# Altium PCB yksb.PcbDoc
Units mm, origin at the board's own origin, x right, y up, seen from the top; angles counter-clockwise.
Board outline 127.76 x 55 mm, 2 copper layers (Top Layer, Bottom Layer); 31 components, 45 nets, 156 pads, 31 vias.
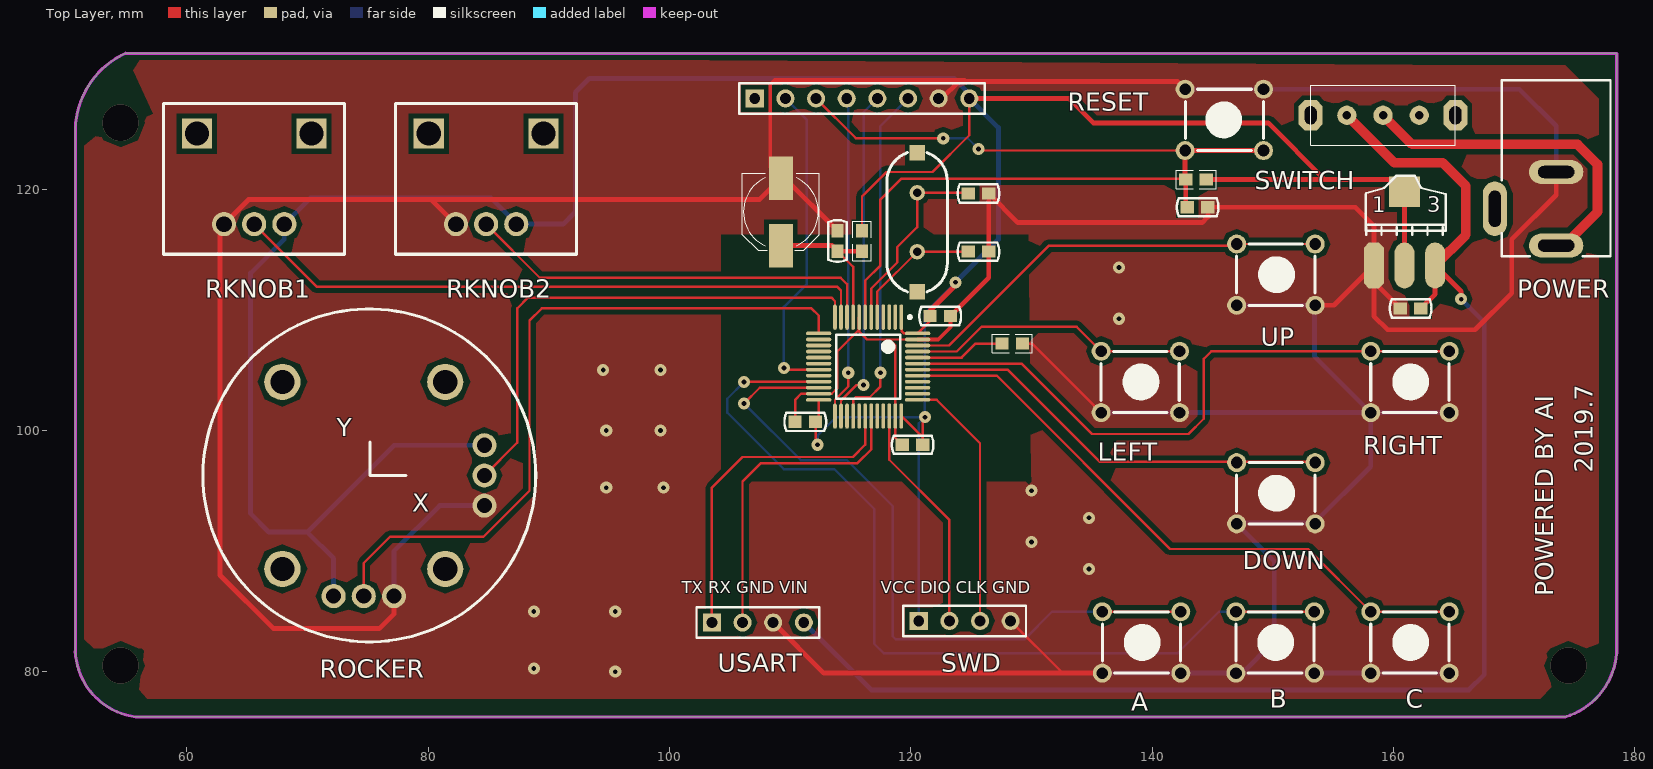
[diagram p0: Top Layer view]
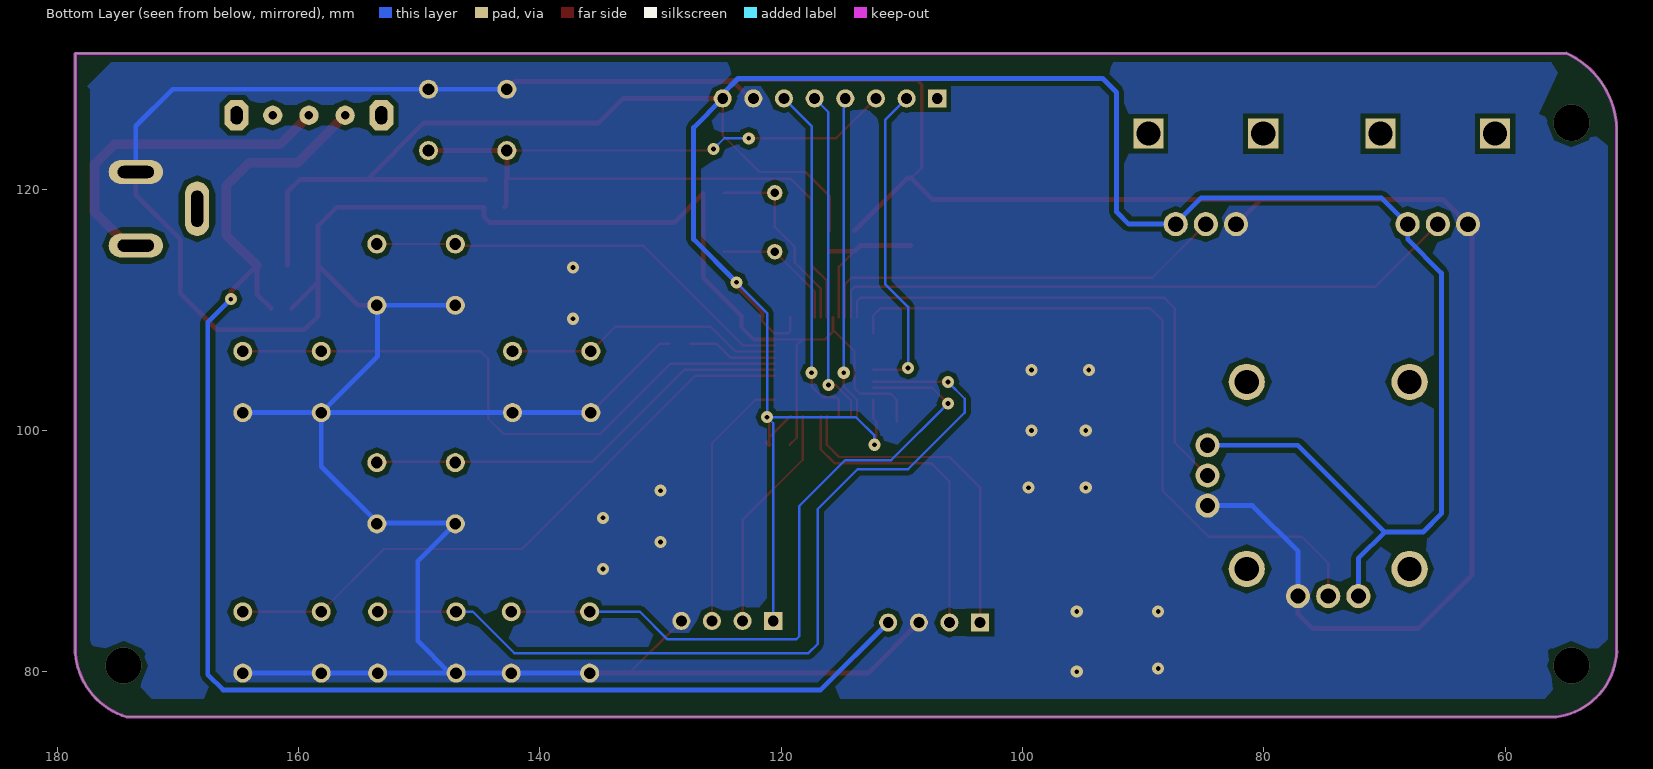
[diagram p1: Bottom Layer view, seen from below]

## Layer stack, top to bottom
Top Solder: solder mask 0.0102, Solder Resist, Dk 3.5
Top Layer: signal copper 0.0356
Dielectric 1: dielectric 0.32, FR-4, Dk 4.8
Bottom Layer: signal copper 0.0356
Bottom Solder: solder mask 0.0102, Solder Resist, Dk 3.5

## Board outline
55.75,76.25 cw(c56.494,81.957) 50.744,81.707 50.75,81.713 50.75,125 cw(c57.905,124.753) 54.905,131.253 54.908,131.25 178.5,131.25 178.5,81.511 178.49,81.501 cw(c172.5,82) 174.25,76.25

## Design rules (kind name [scope] priority, off if disabled: settings)
Clearance [All] p1: gap=0.4
PlaneClearance [All] p1: clearance=1
PolygonConnect [All] p1: connectstyle=Direct reliefconductorwidth=0.254 reliefentries=4 polygonreliefangle="90 Angle" airgapwidth=0.254
RoutingVias [All] p1: holewidth=0.6 width=1 viastyle="Through Hole" minholewidth=0.711 minwidth=1.27 maxholewidth=0.711 maxwidth=1.27
SolderMaskExpansion [All] p1: expansion=0.102
Width [All] p1: maxlimit=0.8 minlimit=0.2 preferedwidth=0.2
29 further rules are at their usual default settings.

## Classes and differential pairs
component class yksb: ""

## Components (designator, comment, footprint, x,y, rotation, side; value= is the part's Value field where it differs from the comment)
C2 "Cap" C-RAD-0603 161.417,110.109 r180 top
C3 "Cap" C-RAD-0603 122.428,109.474 r0 top
C4 "Cap" C-RAD-0603 120.142,98.806 r180 top
C5 "Cap" C-RAD-0603 111.252,100.711 r180 top
C8 "Cap" C-RAD-0603 143.764,118.491 r180 top
C9 "Cap" C-RAD-0603 113.919,115.697 r270 top
C10 "Cap Pol" C-RB-S6 109.22,118.11 r90 top
C11 "Cap" C-RAD-0603 125.603,114.808 r0 top
C12 "Cap" C-RAD-0603 125.603,119.634 r0 top
IC1 "STM32F103C8T6" LQFP48_M 116.459,105.283 r270 top
J1 "CON2" DC-005 173.482,114.427 r90 top
P1 "UART1" HDR1X4 103.505,84.074 r0 top
P2 "SWD" HDR1X4 120.65,84.201 r0 top
Q1 "" dianweiqi 65.572,117.094 r0 top
Q2 "" dianweiqi 84.796,117.094 r0 top
R1 "Res1" 0603-1 143.637,120.777 r180 top
R2 "Res1" 0603-1 115.951,115.697 r270 top
R3 "Res1" 0603-1 128.397,107.188 r0 top
S0 "SW-SPDT" SWITCH_A2 162.131,126.111 r180 top
S1 "KEY_4P" KEY_M 149.225,123.19 r180 top
S2 "KEY_4P" KEY_M 158.115,84.963 r0 top
S3 "KEY_4P" KEY_M 147,97.33 r0 top
S4 "KEY_4P" KEY_M 158.115,106.553 r0 top
S5 "KEY_4P" KEY_M 135.763,106.553 r0 top
S6 "KEY_4P" KEY_M 147,115.443 r0 top
S7 "KEY_4P" KEY_M 146.939,84.963 r0 top
S8 "KEY_4P" KEY_M 135.867,84.963 r0 top
TFT144 "Header 8" HDR1X8 107.061,127.508 r0 top
U1 "AMS1117-3.3" AMS1117 158.368,113.667 r0 top
Y1 "XTAL" XTAL_US 120.523,119.688 r270 top
yaogan1 "2dof" yaogan1 73.907,95.013 r0 top

## Footprints (in the part's own frame and the unit in brackets; to place one, negate y for a bottom-side part, rotate by r counter-clockwise, add the part's x,y. Pads: shape width x height; smd on the part's side, far side on the other; paste and mask are expansions set on the pad)
0603-1 [mm] "贴片带丝印"
  rect 1.1x1 smd: 1(-0.85,0) 2(0.85,0)
  silkscreen extent -1.65,-0.76 1.65,0.76, body extent -1.14,-0.38 1.14,0.38, height 1
AMS1117 [mil]
  oct 65x150 smd: 1(0.03,-0.06)
  oval 65x150 smd: 2(100.03,-0.06) 3(200.03,-0.06)
  rect 100x100 smd: 4(100.03,239.94)
  silkscreen extent -26,100 234,293
C-RAD-0603 [mm] "贴片电容"
  rect 1.1x1 smd: 1(-0.85,0) 2(0.85,0)
  silkscreen extent -1.73,-0.76 1.73,0.76, body extent -1.14,-0.38 1.14,0.38, height 1
C-RB-S6 [mm] "贴片电解"
  rect 3.6x2 smd: 1(-2.794,0) 2(2.794,0)
  silkscreen extent -3.2,-3.2 3.2,3.2
DC-005 [mm] "DC母座5.5mm"
  oval 2x4.5 hole 1 slot 3 at 90 deg: 1(0.889,0) 2(6.985,0)
  oval 4.5x2 hole 1 slot 3 at 0 deg: 3(3.937,5.08)
  silkscreen extent 0,-4.5 14.6,4.5, body extent 0,-4.44 14.6,4.45, height 11
dianweiqi [mm]
  round 2 hole 1.3: 1(2.5,0) 2(0,0) 3(-2.5,0)
  rect 2.5x2.5 hole 2: ""(-4.75,7.5) ""(4.75,7.5)
  silkscreen extent -7.5,-2.5 7.5,10
HDR1X4 [mm] "Connector; Header; 4 Position"
  rect 1.5x1.5 hole 0.9: 1(0,0)
  round 1.5 hole 0.9: 2(2.54,0) 3(5.08,0) 4(7.62,0)
  silkscreen extent -1.27,-1.27 8.89,1.27
HDR1X8 [mm] "Connector; Header; 8 Position"
  rect 1.5x1.5 hole 0.9: 1(0,0)
  round 1.5 hole 0.9: 2(2.54,0) 3(5.08,0) 4(7.62,0) 5(10.16,0) 6(12.7,0) 7(15.24,0) 8(17.78,0)
  silkscreen extent -1.27,-1.27 19.05,1.27
KEY_M [mil]
  round 62 hole 38: 1(0,0) 1(255.91,0) 2(0,-200) 2(255.91,-200)
  silkscreen extent 0,-200 255,0
LQFP48_M [mm] "Thin QFP, 48-Leads, Body 7x7mm, Pitch 0.5mm, IPC Low Density"
  oval 2.1x0.3 smd: 1(-4.1,2.75) 2(-4.1,2.25) 3(-4.1,1.75) 4(-4.1,1.25) 5(-4.1,0.75) 6(-4.1,0.25) 7(-4.1,-0.25) 8(-4.1,-0.75) 9(-4.1,-1.25) 10(-4.1,-1.75) 11(-4.1,-2.25) 12(-4.1,-2.75) 25(4.1,-2.75) 26(4.1,-2.25) 27(4.1,-1.75) 28(4.1,-1.25) 29(4.1,-0.75) 30(4.1,-0.25) 31(4.1,0.25) 32(4.1,0.75) 33(4.1,1.25) 34(4.1,1.75) 35(4.1,2.25) 36(4.1,2.75)
  oval 0.3x2.1 smd: 13(-2.75,-4.1) 14(-2.25,-4.1) 15(-1.75,-4.1) 16(-1.25,-4.1) 17(-0.75,-4.1) 18(-0.25,-4.1) 19(0.25,-4.1) 20(0.75,-4.1) 21(1.25,-4.1) 22(1.75,-4.1) 23(2.25,-4.1) 24(2.75,-4.1) 37(2.75,4.1) 38(2.25,4.1) 39(1.75,4.1) 40(1.25,4.1) 41(0.75,4.1) 42(0.25,4.1) 43(-0.25,4.1) 44(-0.75,4.1) 45(-1.25,4.1) 46(-1.75,4.1) 47(-2.25,4.1) 48(-2.75,4.1)
  silkscreen extent -4.22,-2.65 2.65,3.57, body extent -3.5,-3.5 3.5,3.5, height 1.6
SWITCH_A2 [mm] "平拨开关"
  round 1.6 hole 0.7: 1(0,0) 2(3,0) 3(6,0)
  oct 2x2.5 hole 1 slot 1.5 at 90 deg: 4(9,0) 5(-3,0)
  silkscreen extent -3,-2.5 9,2.5
XTAL_US [mil]
  round 50 hole 28: 1(0,0) 2(192.13,0)
  rect 50x50 smd: ""(-130.32,0) ""(322.44,0)
  silkscreen extent -131,-98 323,98
yaogan1 [mm] "2dof"
  round 2 hole 1.25: 1(10.75,3.75) 2(10.75,1.25) 3(10.75,-1.25) 4(-1.75,-8.75) 5(0.75,-8.75) 6(3.25,-8.75)
  round 3 hole 2: ""(-6,-6.5) ""(-6,9) ""(7.5,-6.5) ""(7.5,9)
  silkscreen extent -12.59,-12.54 15,15.04

## Part data
C2 C3 C4 C5 C8 C9 C11 C12: "无极性电容"
C10: "极性电解电容"
IC1: "单片机"
J1: "连接器"
P1 P2: library part "Header 4", "Header, 4-Pin"
Q1 Q2: library part dianweiqi
R1 R2 R3: "贴片电阻"
S0: "开关"
S1 S2 S3 S4 S5 S6 S7 S8: "轻触按键4P"
TFT144: "Header, 8-Pin"
U1: library part AMS1117
Y1: "Crystal Oscillator"
yaogan1: library part yaogan1

## Via types
v1: diameter 1, hole 0.4, Top Layer to Bottom Layer, 28 vias
v2: diameter 3, hole 3, Top Layer to Bottom Layer, 3 vias

## Nets (pads, with @x,y where several pads share a name; then routed paths per layer and width w, separated by ;. In a path a pad name is that pad's centre, name@x,y a point inside that pad or via, vN(x,y) a via of type N, cw(c..) or ccw(c..) an arc to the next point about the centre after c; other vN are vias at no path point)
3.3V: C3.1 C4.1 C5.1 IC1.1 IC1.24 IC1.36 IC1.48 P2.1 Q1.1 Q2.1 R1.1 R2.1 TFT144.8 U1.2 U1.4 yaogan1.1 yaogan1.4 | length 271.2
  Top Layer w0.2: v1(112.268,98.806) 112.102,98.972 C5.1 112.359,100.968 IC1.24 ; R2.1 115.951,119.38 117.983,121.412 121.793,121.412 124.841,124.46 TFT144.8 ; IC1.36 120.992,99.4 ; IC1.1 119.253,109.339 119.253,108.204 119.424,108.033 IC1.48 121.578,109.052 C3.1 ; C4.1 120.992,99.4 ; v1(121.158,101.092) 120.992,100.926 120.992,99.4
  Top Layer w0.4: C4.1 C4.1@121.158,98.972 ; C3.1 121.578,109.894 123.698,112.014 v1(123.698,112.268) ; TFT144.8 133.096,127.508 135.128,125.476 149.606,125.476 154.305,120.777 ; R1.1 154.305,120.777 ; U1.2 U1.4 159.893,120.777 154.305,120.777
  Bottom Layer w0.2: v1(112.268,98.806) 112.268,99.568 113.792,101.092 v1(121.158,101.092) ; P2.1 120.65,100.584 v1(121.158,101.092) ; v1(123.698,112.268) 121.158,109.728 v1(121.158,101.092)
  Bottom Layer w0.4: yaogan1.4 72.157,89.387 69.977,91.567 ; yaogan1.1 77.173,98.763 69.977,91.567 ; v1(123.698,112.268) 127.254,115.824 127.254,125.095 TFT144.8 124.841,127.889 123.571,129.159 93.345,129.159 92.202,128.016 92.202,118.11 91.186,117.094 Q2.1 87.296,117.174 85.217,119.253 70.231,119.253 Q1.1 68.072,115.824 65.278,113.03 65.278,93.091 66.802,91.567 69.977,91.567
BLK: TFT144.1
BOOT0: IC1.44 R3.1 | length 7.5
  Top Layer w0.2: IC1.44 124.206,106.033 125.361,107.188 R3.1
CS: IC1.25 TFT144.4 | length 26.8
  Top Layer w0.2: IC1.25 113.709,102.533 114.808,103.632 v1(114.808,104.775)
  Bottom Layer w0.2: TFT144.4 114.808,127.381 v1(114.808,104.775)
DI: IC1.28 TFT144.6 | length 28.9
  Top Layer w0.2: IC1.28 115.209,102.509 115.443,102.743 116.586,102.743 117.475,103.632 v1(117.475,104.775)
  Bottom Layer w0.2: v1(117.475,104.775) 117.475,125.222 TFT144.6
GND: C2.2 C3.2 C4.2 C5.2 C8.1 C9.1 C10.2 C11.2 C12.2 IC1.8 IC1.23 IC1.35 IC1.47 J1.2 P1.3 P2.4 Q1.3 Q2.3 R3.2 S1.2 S2.2 S3.2 S4.2 S5.2 S6.2 S7.2 S8.2 TFT144.7 U1.1 yaogan1.3 yaogan1.6 | length 469.9
  Top Layer w0.2: C10.2@108.331,121.793 C10.2 ; C5.2 110.402,102.528 110.907,103.033 IC1.23 113.447,103.033 113.919,103.505 113.919,106.557 115.659,108.297 115.659,109.333 IC1.8 115.709,108.192 116.368,107.533 118.237,107.533 ; C4.2 118.709,99.389 IC1.35 118.709,107.061 118.237,107.533 ; IC1.47 118.237,107.533 ; 124.46,129.032 124.587,128.905 ; P2.4 132.588,79.883 ; R3.2 130.048,107.188 S5.2@135.763,101.473
  Top Layer w0.3: C10.2@108.331,121.793 108.331,128.651 108.712,129.032 124.46,129.032 ; IC1.47 122.265,107.533 123.278,108.546 C3.2
  Top Layer w0.4: yaogan1.6 77.157,84.777 75.946,83.566 67.183,83.566 62.738,88.011 62.738,116.76 Q1.3 65.104,119.126 80.264,119.126 ; Q2.3 80.264,119.126 ; P1.3 112.776,79.883 132.588,79.883 S8.2@135.867,79.883 ; C9.1 109.562,120.904 C10.2 107.442,119.126 80.264,119.126 ; TFT144.7 122.555,127.508 123.952,128.905 124.587,128.905 142.09,128.905 S1.2@142.725,128.27 ; C3.2 126.453,112.649 C11.2 C12.2 128.866,117.221 144.145,117.221 144.614,117.69 C8.1 156.845,118.491 158.369,116.967 U1.1 ; S6.2@153.439,110.363 153.5,110.363 155.067,110.363 U1.1 ; C2.2 U1.1@158.369,112.307 ; J1.2 173.482,119.507 169.799,115.824 169.799,111.379 166.751,108.331 159.512,108.331 158.369,109.474 U1.1@158.369,112.307 ; U1.1@158.369,112.307 U1.1
  Bottom Layer w0.4: yaogan1.6 77.157,89.984 80.936,93.763 yaogan1.3 ; S8.2@135.74,80.01 S8.2@135.867,79.883 ; S5.2@135.763,101.473 142.263,101.473 S4.2@158.115,101.473 ; S8.2@135.89,79.883 142.367,79.883 146.939,79.883 S7.2@147.447,79.883 ; S1.2@142.725,128.27 149.225,128.27 170.434,128.27 173.482,125.222 J1.2 ; S6.2@146.939,110.363 147,110.363 153.439,110.363 153.439,106.149 S4.2@158.115,101.473 ; S7.2@153.312,79.883 S7.2@147.447,79.883 ; S7.2@153.439,79.883 S2.2@158.115,79.883 ; S2.2@158.242,79.883 S2.2@164.615,79.883 ; S4.2@164.615,101.473 S4.2@158.115,101.473 ; S7.2@147.447,79.883 150.114,82.55 150.114,89.154 146.939,92.329 153.439,92.329 158.115,97.005 S4.2@158.115,101.473
  other v1: 95.5,80 88.75,80.25 88.75,85 95.5,85 134.75,88.5 130,90.75 134.75,92.75 130,95 94.75,95.25 99.5,95.25 94.75,100 99.25,100 94.5,105 99.25,105 137.25,109.25 137.25,113.5
NRST: C8.2 IC1.7 R1.2 S1.1 TFT144.3 | length 79.9
  Top Layer w0.2: TFT144.3 115.443,124.206 v1(122.682,124.206) ; IC1.7 116.209,112.399 117.475,113.665 117.475,119.126 119.188,120.839 R1.2@142.725,120.839 ; v1(125.603,123.317) 125.73,123.19 S1.1@142.725,123.19
  Top Layer w0.4: C8.2 142.787,118.618 R1.2 142.725,120.839 142.725,123.19 S1.1@149.225,123.19
  Bottom Layer w0.2: v1(122.682,124.206) 124.714,124.206 v1(125.603,123.317)
PA0: IC1.10 Q2.2 | length 34.7
  Top Layer w0.2: Q2.2 89.241,112.649 114.173,112.649 114.709,112.113 IC1.10
PA1: IC1.11 Q1.2 | length 53.1
  Top Layer w0.2: Q1.2 70.779,111.887 113.919,111.887 114.209,111.597 IC1.11
PA2: IC1.12 yaogan1.2 | length 43.1
  Top Layer w0.2: yaogan1.2 87.376,98.982 87.376,110.109 88.265,110.998 113.411,110.998 113.709,110.7 IC1.12
PA3: IC1.13 yaogan1.5 | length 59.2
  Top Layer w0.2: yaogan1.5 74.657,89.008 76.835,91.186 84.582,91.186 88.392,94.996 88.392,109.093 89.408,110.109 111.76,110.109 112.359,109.51 IC1.13
PA4: IC1.14
PA5: IC1.15
PA6: IC1.16
PA7: IC1.17
PA8: IC1.29
PA9: IC1.30 P1.1 | length 27.7
  Top Layer w0.2: P1.1 103.505,95.25 106.045,97.79 115.189,97.79 116.205,98.806 116.205,101.179 IC1.30
PA10: IC1.31 P1.2 | length 26.2
  Top Layer w0.2: P1.2 106.045,95.758 107.569,97.282 115.57,97.282 116.709,98.421 IC1.31
PA11: IC1.32
PA12: IC1.33
PA13: IC1.34 P2.2 | length 19
  Top Layer w0.2: IC1.34 118.209,97.564 123.19,92.583 P2.2
PA14: IC1.37 P2.3 | length 21.4
  Top Layer w0.2: IC1.37 122.13,102.533 125.73,98.933 P2.3
PA15: IC1.38
PB0: IC1.18
PB1: IC1.19 TFT144.2 | length 26.8
  Top Layer w0.2: v1(109.474,105.156) 109.597,105.033 IC1.19
  Bottom Layer w0.2: v1(109.474,105.156) 109.474,110.236 111.379,112.141 111.379,125.73 TFT144.2
PB2: IC1.20
PB3: IC1.39
PB4: IC1.40
PB5: IC1.41 S2.1 | length 52.2
  Top Layer w0.2: IC1.41 127.115,104.533 141.478,90.17 152.908,90.17 158.115,84.963 S2.1@164.615,84.963
PB6: IC1.42 S3.1 | length 35.7
  Top Layer w0.2: IC1.42 128.012,105.033 135.636,97.409 S3.1@153.058,97.409
PB7: IC1.43 S4.1 | length 52.2
  Top Layer w0.2: IC1.43 129.163,105.533 135.001,99.695 143.002,99.695 144.272,100.965 144.272,105.918 144.907,106.553 158.115,106.553 S4.1@164.615,106.553
PB8: IC1.45 S5.1 | length 23.4
  Top Layer w0.2: IC1.45 123.805,106.533 125.857,108.585 133.731,108.585 135.763,106.553 S5.1@142.263,106.553
PB9: IC1.46 S6.1 | length 36.4
  Top Layer w0.2: IC1.46 123.162,107.033 131.445,115.316 146.812,115.316 S6.1@146.939,115.443 ; S6.1@147,115.443 S6.1@153.5,115.443
PB10: IC1.21 S7.1 | length 74.2
  Top Layer w0.2: v1(106.172,104.013) 106.192,104.033 IC1.21 ; S7.1@146.939,84.963 S7.1@153.439,84.963
  Bottom Layer w0.2: v1(106.172,104.013) 104.775,102.616 104.775,101.473 109.474,96.774 113.665,96.774 116.967,93.472 116.967,82.296 117.729,81.534 142.113,81.534 145.542,84.963 S7.1@146.939,84.963
PB11: IC1.22 S8.1 | length 58.3
  Top Layer w0.2: v1(106.172,102.235) 107.47,103.533 IC1.22 ; S8.1@135.867,84.963 S8.1@142.367,84.963
  Bottom Layer w0.2: v1(106.172,102.235) 110.871,97.536 114.681,97.536 118.491,93.726 118.491,82.931 118.745,82.677 129.413,82.677 131.699,84.963 S8.1@135.867,84.963
PB13: IC1.26 TFT144.5 | length 27.9
  Top Layer w0.2: IC1.26 114.209,102.467 115.501,103.759 v1(116.078,103.759)
  Bottom Layer w0.2: v1(116.078,103.759) 116.078,126.365 TFT144.5
PB14: IC1.27
PC13: IC1.2
PC14: IC1.3
PC15: IC1.4
PD0: C11.1 IC1.5 Y1.2 | length 11
  Top Layer w0.2: IC1.5 117.209,111.494 Y1.2 C11.1
PD1: C12.1 IC1.6 Y1.1 | length 16.1
  Top Layer w0.2: IC1.6 116.709,111.76 118.872,113.923 118.872,115.189 120.523,116.84 Y1.1 124.699,119.688 C12.1
POWER: J1.1 S0.2 | length 28
  Top Layer w0.2: J1.1 J1.1@174.117,115.316
  Top Layer w0.8: S0.2 161.544,123.698 175.26,123.698 176.911,122.047 176.911,118.11 J1.1@174.117,115.316
VDDA: C9.2 C10.1 IC1.9 R2.2 | length 12.9
  Top Layer w0.2: C9.2 115.209,113.557 IC1.9
  Top Layer w0.4: C10.1 113.45,115.316 C9.2 R2.2
VIN: C2.1 P1.4 S0.3 U1.3 | length 118.8
  Top Layer w0.4: C2.1 163.449,111.291 U1.3 165.608,111.506 v1(165.608,110.871)
  Top Layer w0.8: S0.3 160.068,122.174 164.084,122.174 165.989,120.269 165.989,116.205 U1.3
  Bottom Layer w0.4: P1.4 116.713,78.486 166.243,78.486 167.513,79.756 167.513,108.966 v1(165.608,110.871)
pads on no net: J1.3 Q1. Q2. S0.1 S0.4 S0.5 Y1. yaogan1.
copper on no net:
  other v2: 54.5,80.5 174.5,80.5 54.5,125.5

## Polygon pours and split planes (outlines as drawn)
GND on Top Layer "AutoNaming" (solid, remove dead copper, pour order 6): 55,131 51.5,127.5 51.5,126.25 51.5,79.75 52.5,78.75 53.5,77.75 56.5,77.75 175.25,77.75 175.75,78.25 177,79.5 177,79.75 177,127.5 174.25,130.25 168,130.25
GND on Bottom Layer "AutoNaming" (solid, remove dead copper, pour order 8): 54.75,130.5 54.75,129.5 51.25,126 51.5,125.75 51.5,82.75 51.5,80.75 54,78.25 54.5,77.75 56.75,77.75 172.5,77.75 174.75,77.75 175,77.75 176.75,79.5 177.25,80 177.25,82.5 177.25,128.25 177.5,128.5 175.5,130.5 174.25,130.5

## Keep-outs
Keep-Out Layer:
  lines w0.254: 50.744,81.707 ccw(c56.494,81.957) 55.75,76.25 174.25,76.25 ccw(c172.5,82) 178.49,81.501 ; 50.75,81.713 50.75,125 cw(c57.905,124.753) 54.905,131.253 ; 54.908,131.25 178.5,131.25 178.5,81.511

## Other copper
Top Layer:
  pour cut-out: 104.25,116.25 104.25,95.75 129.5,95.75 129.75,95.5 130,95.75 129.75,116.25

## Silkscreen, mask and mechanical layers (free items; w line width, h text height)
Top Overlay:
  text "RESET" at 133,126.5 h1.52
  text "SWITCH" at 148.5,120 h1.52
  text "RKNOB1" at 61.5,111 h1.52
  text "RKNOB2" at 81.5,111 h1.52
  text "POWER" at 170.25,111 h1.52
  text "UP" at 149,107 h1.52
  text "RIGHT" at 157.5,98 h1.52
  text "LEFT" at 135.5,97.5 h1.52
  text "2019.7" at 176.5,96.5 h1.52 r90
  text "DOWN" at 147.5,88.5 h1.52
  text "TX RX GND VIN" at 101,86.5 h1
  text "VCC DIO CLK GND" at 117.5,86.5 h1
  text "POWERED BY AI" at 173.25,86.25 h1.52 r90
  text "USART" at 104,80 h1.52
  text "SWD" at 122.5,80 h1.52
  text "ROCKER" at 71,79.5 h1.52
  text "B" at 149.75,77 h1.52
  text "C" at 161,77 h1.52
  text "A" at 138.25,76.75 h1.52

## Text inside footprints (layer, text, board x,y; h text height)
U1: Top Overlay "1" at 158.217,118.059 h1.27; Top Overlay "3" at 162.789,118.059 h1.27
yaogan1: Top Overlay "X" at 78.657,93.263 h1.52; Top Overlay "Y" at 72.407,99.513 h1.52